# Altium PCB PCB.PcbDoc
Units mm, origin at the board's own origin, x right, y up, seen from the top; angles counter-clockwise.
Board outline 80.01 x 50.04 mm, 2 copper layers (Top Layer, Bottom Layer); 25 components, 40 nets, 101 pads, 2 vias.
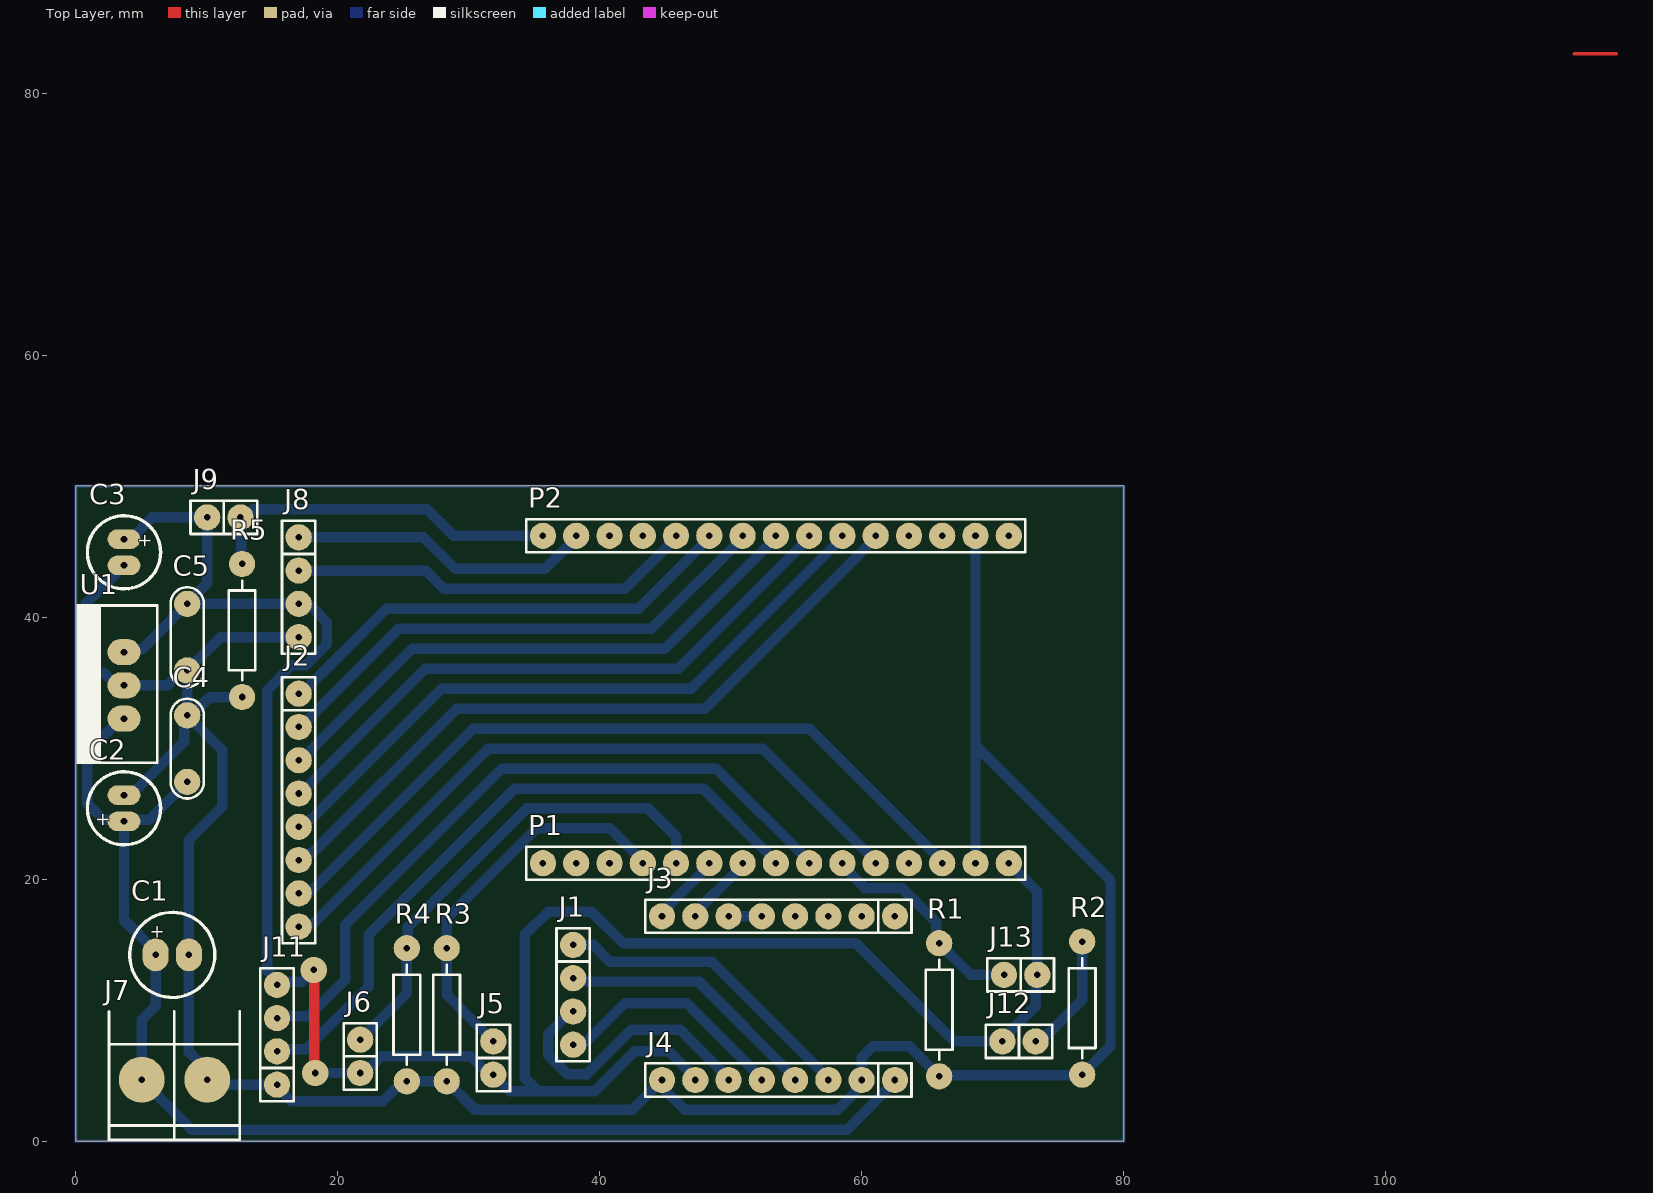
[diagram p0: Top Layer view]
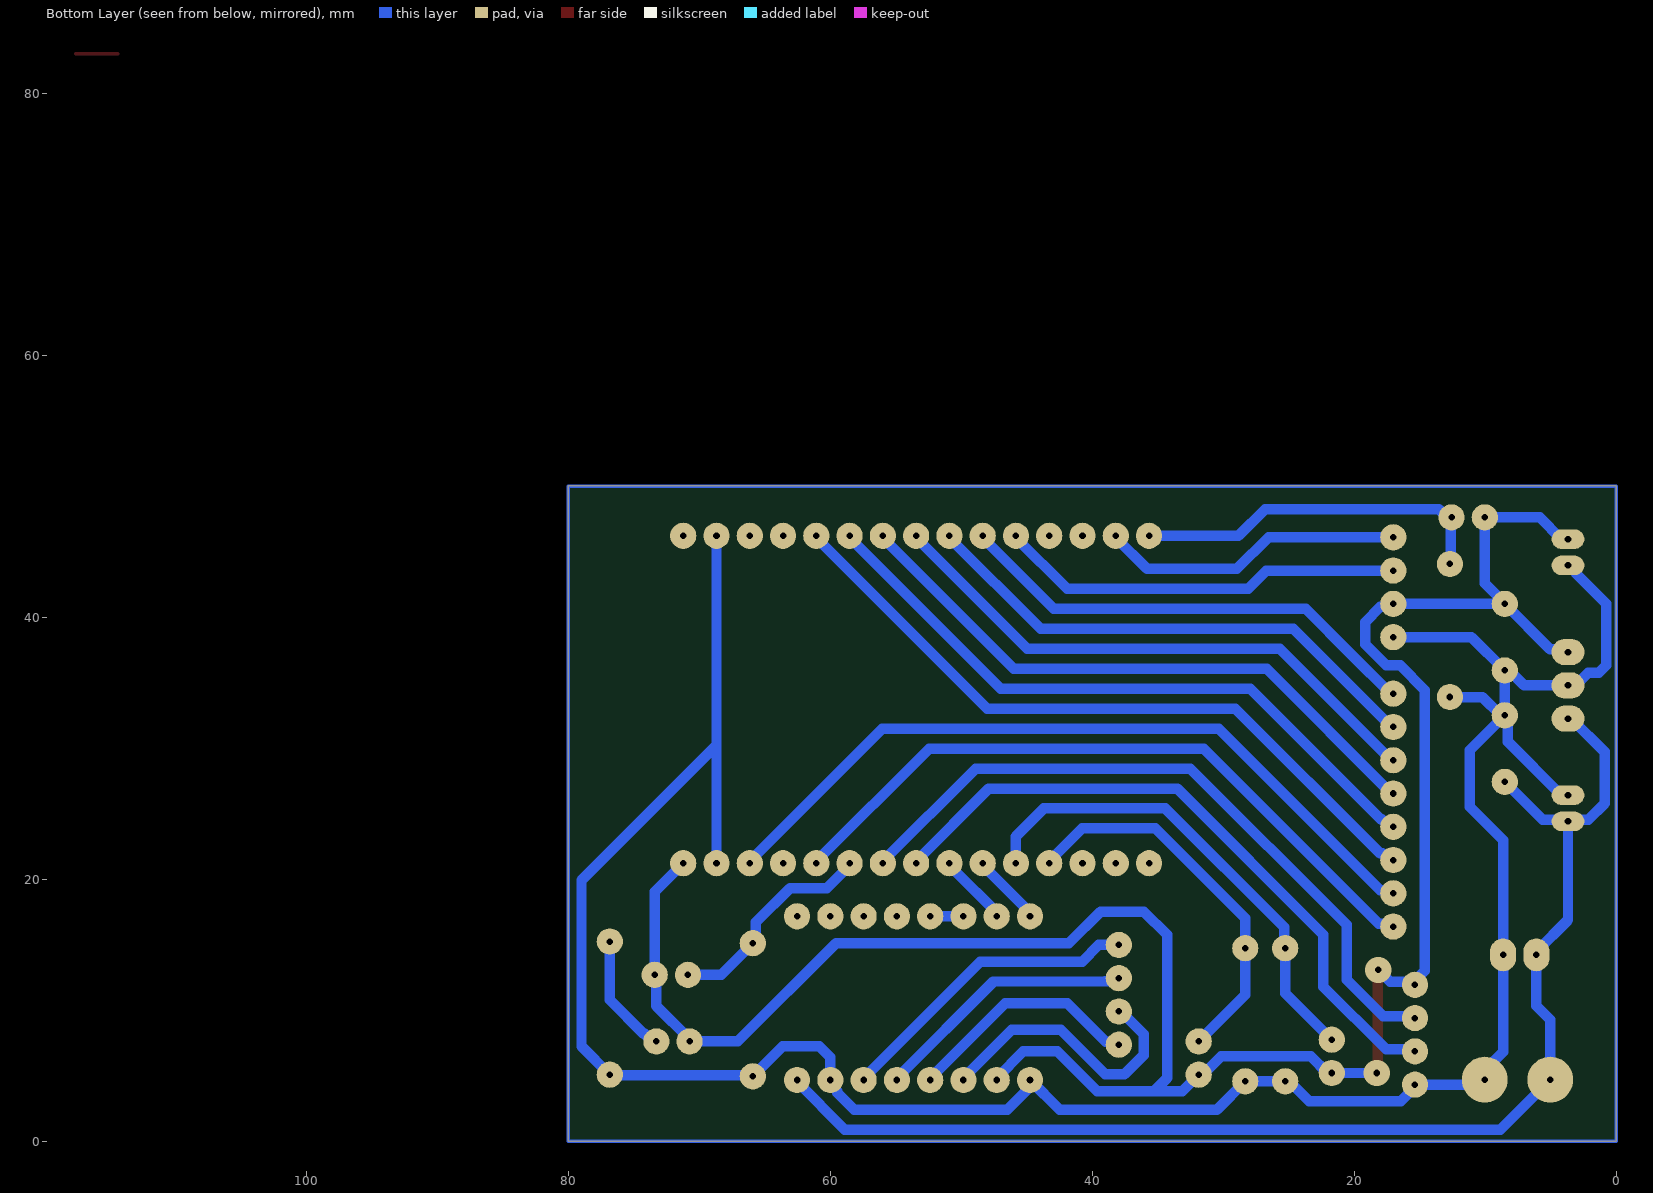
[diagram p1: Bottom Layer view, seen from below]

## Layer stack, top to bottom
Top Solder: solder mask 0.0102, Solder Resist, Dk 3.5
Top Layer: signal copper 0.0356
Dielectric 1: dielectric 0.32, FR-4, Dk 4.8
Bottom Layer: signal copper 0.0356
Bottom Solder: solder mask 0.0102, Solder Resist, Dk 3.5

## Board outline
0,0 0,50.038 80.01,50.038 80.01,0

## Design rules (kind name [scope] priority, off if disabled: settings)
Clearance Clearance_1 [All] p1: gap=0.5 ignorepadtopadclearanceinfootprint=FALSE
Clearance [All] p2: gap=0.5 ignorepadtopadclearanceinfootprint=FALSE
PolygonConnect [All] p1: connectstyle=Relief reliefconductorwidth=0.254 reliefentries=4 polygonreliefangle="90 Angle" airgapwidth=0.254
RoutingVias [All] p1: holewidth=0.711 width=1.27 viastyle="Through Hole" minholewidth=0.711 minwidth=1.27 maxholewidth=0.711 maxwidth=1.27
SolderMaskExpansion [All] p1: expansion=0.102 istentingtop=FALSE
Width [All] p1: maxlimit=0.8 minlimit=0.8 preferedwidth=0.8 checkconnectedcopper=TRUE
30 further rules are at their usual default settings.

## Components (designator, comment, footprint, x,y, rotation, side; value= is the part's Value field where it differs from the comment)
C1 "CAPPOL" CAP100RP2 7.366,14.224 r0 top
C2 "CAPPOL" CAP100RP 3.683,25.416 r90 top
C3 "CAPPOL" CAP100RP 3.683,44.958 r270 top
C4 "CAP" CAP200 8.509,29.972 r90 top
C5 "CAP" CAP200 8.509,38.481 r270 top
J1 "MOTOR" SIP4 37.973,11.176 r270 top
J2 "TECLADO" SIP8 17.018,34.163 r270 top
J3 "A4988-A" SIP8 62.535,17.172 r180 top
J4 "A4988-B" SIP8 62.535,4.672 r180 top
J5 "CON2" SIP2 31.877,6.35 r90 top
J6 "CON2" SIP2 21.717,6.477 r90 top
J7 "BORNERA 2" BORNERA2 7.533,4.7 r90 top
J8 "DISPLAY" SIP4 17.018,42.291 r270 top
J9 "CON2" SIP2 11.303,47.625 r0 top
J11 "ULTRASONICO" SIP4 15.367,8.128 r90 top
J12 "CON2" SIP2 72.009,7.62 r0 top
J13 "CON2" SIP2 72.136,12.7 r0 top
P1 "Header 15" HDR1X15 35.667,21.22 r0 top
P2 "Header 15" HDR1X15 35.667,46.22 r0 top
R1 "RES" RES400 65.913,4.953 r90 top
R2 "RES" RES400 76.835,5.08 r90 top
R3 "RES" RES400 28.321,4.572 r90 top
R4 "RES" RES400 25.273,4.572 r90 top
R5 "RES" RES400 12.7,33.909 r90 top
U1 "78XX" "TO-220 V" 3.683,34.798 r90 top

## Footprints (in the part's own frame and the unit in brackets; to place one, negate y for a bottom-side part, rotate by r counter-clockwise, add the part's x,y. Pads: shape width x height; smd on the part's side, far side on the other; paste and mask are expansions set on the pad)
BORNERA2 [mm] "Bornera con Tornillos 5mm separación"
  round 3.5 hole 0.5: 1(0,2.5) 2(0,-2.5)
  silkscreen extent -4.6,-5 5.2,5, body extent -3.76,-4.89 3.94,5.61, height 10
CAP100RP [mm] "Body diameter 5mm"
  oval 1.5x2.5 hole 0.5: 1(-1,0) 2(1,0)
  silkscreen extent -2.79,-2.79 2.79,2.79, body extent -2.53,-2.51 2.53,2.54, height 11.53
CAP100RP2 [mm] "Body diameter 6.5mm"
  oval 2x2.5 hole 0.5: 1(-1.27,0) 2(1.27,0)
  silkscreen extent -3.25,-3.25 3.25,3.25, body extent -3.15,-3.18 3.2,3.18, height 11.53
CAP200 [mm]
  round 2 hole 0.5: 1(-2.54,0) 2(2.54,0)
  silkscreen extent -3.81,-1.27 3.81,1.27, body extent -2.79,-1.17 2.79,1.12, height 6.24
HDR1X15 [mm] "Connector; Header; 15 Position"
  round 2 hole 0.5: 1(0,0) 2(2.54,0) 3(5.08,0) 4(7.62,0) 5(10.16,0) 6(12.7,0) 7(15.24,0) 8(17.78,0) 9(20.32,0) 10(22.86,0) 11(25.4,0) 12(27.94,0) 13(30.48,0) 14(33.02,0) 15(35.56,0)
  silkscreen extent -1.27,-1.27 36.83,1.27
RES400 [mm]
  round 2 hole 0.5: 1(0,0) 2(10.16,0)
  silkscreen extent 1.27,-1.02 8.89,1.02, body extent -0.3,-1.14 10.46,1.17, height 2.43
SIP2 [mm]
  round 2 hole 0.5: 1(-1.27,0) 2(1.27,0)
  silkscreen extent -2.54,-1.27 2.54,1.27
SIP4 [mm]
  round 2 hole 0.5: 1(-3.81,0) 2(-1.27,0) 3(1.27,0) 4(3.81,0)
  silkscreen extent -5.08,-1.27 5.08,1.27, body extent -5.08,-1.27 5.08,1.27, height 8.38
SIP8 [mm]
  round 2 hole 0.5: 1(0,0) 2(2.54,0) 3(5.08,0) 4(7.62,0) 5(10.16,0) 6(12.7,0) 7(15.24,0) 8(17.78,0)
  silkscreen extent -1.27,-1.27 19.05,1.27, body extent -1.27,-1.27 19.05,1.27, height 8.38
"TO-220 V" [mm]
  oval 2x2.5 hole 0.5: 1(-2.54,0) 2(0,0) 3(2.54,0)
  silkscreen extent -5.9,-2.54 6.1,3.54, body extent -5,-2 5,3, height 18

## Part data
J1 J8 J11: library part CON4
J2 J3 J4: library part CON8
P1 P2: "Header, 15-Pin", LatestRevisionDate=17-Jul-2002, LatestRevisionNote="Re-released for DXP Platform.", Publisher="Altium Limited"
U1: "REGULDOR POSITIVO"

## Via types
v1: diameter 2, hole 0.5, Top Layer to Bottom Layer, 2 vias

## Nets (pads, with @x,y where several pads share a name; then routed paths per layer and width w, separated by ;. In a path a pad name is that pad's centre, name@x,y a point inside that pad or via, vN(x,y) a via of type N, cw(c..) or ccw(c..) an arc to the next point about the centre after c; other vN are vias at no path point)
3V3: P2.15
+5V: C3.1 C5.1 J4.7 J5.1 J6.1 J8.3 J9.1 J11.4 J12.1 J13.2 P1.15 U1.3 | length 174.8
  Top Layer w0.8: v1(18.161,13.081) 18.224,13.018 18.224,5.271 v1(18.288,5.207)
  Bottom Layer w0.8: U1.3 3.913,37.568 5.056,37.568 C5.1 ; C3.1 4.183,45.958 5.85,47.625 J9.1 10.033,42.608 8.509,41.084 C5.1 ; J11.4 15.597,12.168 17.248,12.168 v1(18.161,13.081) ; J11.4@15.367,12.245 14.605,13.007 14.605,34.437 16.49,36.322 17.546,36.322 19.177,37.953 19.177,39.624 18.01,40.791 17.248,40.791 J8.3 C5.1 ; v1(18.288,5.207) J6.1 ; J6.1@22.042,5.207 23.307,6.472 30.16,6.472 J5.1@31.552,5.08 ; J5.1 33.147,3.81 35.306,3.81 ; J4.7 47.295,4.819 45.256,6.858 42.672,6.858 39.624,3.81 35.306,3.81 ; P1.15 73.406,19.041 J13.2 73.294,12.588 73.294,10.322 70.739,7.767 J12.1 67.056,7.62 59.563,15.113 41.783,15.113 39.37,17.526 36.068,17.526 34.29,15.748 34.29,4.826 35.306,3.81
A1: J1.4 J4.5 | length 17.9
  Bottom Layer w0.8: J1.4@38.203,7.596 38.965,7.596 41.91,10.541 46.653,10.541 52.375,4.819 J4.5
A2: J1.2 J4.4 | length 20.2
  Bottom Layer w0.8: J1.2 38.203,12.216 39.017,12.216 39.042,12.192 47.542,12.192 54.915,4.819 J4.4
B1: J1.3 J4.6 | length 21.7
  Bottom Layer w0.8: J1.3 37.826,9.906 36.073,8.153 36.073,6.579 37.542,5.11 39.019,5.11 42.418,8.509 46.145,8.509 49.835,4.819 J4.6
B2: J1.1 J4.3 | length 23.8
  Bottom Layer w0.8: J1.1 39.497,14.986 40.767,13.716 48.558,13.716 57.455,4.819 J4.3
D2: P2.12
D4: J2.6 P2.11 | length 54.4
  Bottom Layer w0.8: J2.6 17.343,21.463 17.844,21.965 18.028,21.965 29.083,33.02 48.014,33.02 61.067,46.073 P2.11
D5: J2.3 P2.8 | length 43.6
  Bottom Layer w0.8: J2.3 17.165,29.083 25.674,37.592 44.966,37.592 53.447,46.073 P2.8
D12: P1.12
D13: J2.7 P1.13 | length 58.7
  Bottom Layer w0.8: J2.7 17.248,19.153 18.01,19.153 30.353,31.496 56.018,31.496 66.147,21.367 P1.13
D14: J2.8 P1.11 | length 53.4
  Bottom Layer w0.8: J2.8 17.248,16.613 18.137,16.613 31.496,29.972 52.462,29.972 61.067,21.367 P1.11
D15: P2.13
D18: J2.2 P2.7 | length 40
  Bottom Layer w0.8: J2.2 17.165,31.623 24.658,39.116 43.95,39.116 50.907,46.073 P2.7
D19: J2.1 P2.6 | length 36.4
  Bottom Layer w0.8: J2.1 17.225,34.163 20.218,37.156 23.702,40.64 42.934,40.64 48.367,46.073 P2.6
D21: J8.2 P2.5 | length 31.2
  Bottom Layer w0.8: J8.2 26.709,43.561 28.106,42.164 41.918,42.164 45.827,46.073 P2.5
D22: J8.1 P2.2 | length 23.3
  Bottom Layer w0.8: J8.1 26.543,46.101 28.956,43.688 35.822,43.688 38.207,46.073 P2.2
D23: J9.2 P2.1 R5.2 | length 27.8
  Bottom Layer w0.8: R5.2 12.636,44.133 12.636,47.561 J9.2 12.898,47.625 13.533,48.26 26.797,48.26 28.837,46.22 P2.1
D25: J11.2 P1.8 | length 51.2
  Bottom Layer w0.8: J11.2 15.515,7.006 17.567,7.006 22.352,11.791 22.352,15.748 33.528,26.924 47.89,26.924 53.447,21.367 P1.8
D26: J11.3 P1.9 | length 54
  Bottom Layer w0.8: J11.3 15.515,9.546 17.801,9.546 20.574,12.319 20.574,16.51 32.512,28.448 48.906,28.448 55.987,21.367 P1.9
D27: J13.1 P1.10 R1.2 | length 16.9
  Bottom Layer w0.8: P1.10 58.527,21.073 60.28,19.32 63.074,19.32 65.683,16.711 65.683,15.343 R1.2 68.326,12.7 J13.1
  Bottom Layer w1: P1.10 P1.10@58.599,21.148
D32: J3.8 P1.6 | length 5.8
  Bottom Layer w0.8: J3.8@44.35,17.056 48.367,21.073 P1.6
D33: J3.7 P1.7 | length 5.8
  Bottom Layer w0.8: J3.7@46.89,17.056 50.907,21.073 P1.7
D34: J5.2 P1.4 R3.2 | length 29.9
  Bottom Layer w0.8: J5.2 28.321,11.176 R3.2 28.321,17.018 35.179,23.876 40.778,23.876 43.287,21.367 P1.4
D35: J6.2 P1.5 R4.2 | length 37.3
  Bottom Layer w0.8: J6.2 25.273,11.303 R4.2 25.336,14.795 25.336,16.319 34.417,25.4 43.688,25.4 45.827,23.261 P1.5
EN: P1.1
EN_DVR: J3.1
GND: C1.2 C2.2 C3.2 C4.2 C5.2 J4.2 J4.8 J7.2 J8.4 J11.1 P1.14 P2.14 R1.1 R2.1 R3.1 R4.1 R5.1 U1.2 | length 204.8
  Bottom Layer w0.8: C2.2 4.183,26.416 8.279,30.512 8.279,32.282 C4.2 ; C3.2 3.372,43.958 3.049,43.635 3.049,43.324 0.762,41.037 0.762,36.322 1.328,35.756 2.15,35.756 3.108,34.798 U1.2 7.041,34.798 8.184,35.941 C5.2 ; R5.1 10.223,33.909 8.826,32.512 C4.2 ; J11.1@15.367,4.294 10.439,4.294 J7.2 10.033,5.431 8.636,6.828 C1.2 8.636,22.987 11.176,25.527 11.176,29.845 C4.2 ; J11.1 15.367,4.117 16.436,3.048 23.424,3.048 24.948,4.572 R4.1 R3.1 30.48,2.413 42.496,2.413 J4.8 ; J8.4 11.049,38.481 C5.2 ; J4.8@44.972,3.923 46.482,2.413 58.166,2.413 59.454,3.701 59.454,3.807 59.995,4.347 J4.2 ; J4.2@59.995,4.525 59.995,6.401 60.833,7.239 63.627,7.239 R1.1 65.977,5.016 76.772,5.016 R2.1 78.994,7.239 78.994,19.919 68.687,30.226 ; P1.14 68.687,30.226 ; P2.14 68.687,30.226 ; C4.2 C5.2
MS1: J3.2
MS2: J3.3
MS3: J3.4
NetJ12_2: J12.2 R2.2 | length 9.3
  Bottom Layer w0.8: J12.2@73.444,7.404 73.444,7.46 74.169,8.185 74.225,8.185 76.835,10.795 R2.2
RESET: J3.5 J3.6 | length 2.5
  Bottom Layer w0.8: J3.6 J3.5
RX0: P2.4
RX2: J2.5 P2.10 | length 50.8
  Bottom Layer w0.8: J2.5 17.343,24.003 17.908,24.568 17.964,24.568 27.94,34.544 46.998,34.544 58.527,46.073 P2.10
TX0: P2.3
TX2: J2.4 P2.9 | length 47.2
  Bottom Layer w0.8: J2.4 17.165,26.543 26.69,36.068 45.982,36.068 55.987,46.073 P2.9
VMOT: C1.1 C2.1 C4.1 J4.1 J7.1 U1.1 | length 99.1
  Bottom Layer w0.8: U1.1 3.433,32.258 0.889,29.714 0.889,25.781 2.12,24.55 3.549,24.55 C2.1 ; C4.1 5.627,24.55 3.817,24.55 C2.1 ; J4.1 62.535,4.525 58.899,0.889 8.844,0.889 J7.1 5.033,9.267 6.096,10.33 C1.1 6.096,14.474 3.683,16.887 C2.1
VN: P1.3
VP: P1.2
copper on no net: | length 263.2
  Top Layer w0.254: 114.383,83.016 115.17,83.016 117.602,83.016
  Bottom Layer w0.254: 0,0 80,0 80,50 0,50 0,0

## Text inside footprints (layer, text, board x,y; h text height)
C1: Top Overlay "+" at 5.664,15.519 h1.02
C2: Top Overlay "+" at 2.515,23.968 h1.02 r90
C3: Top Overlay "+" at 4.851,46.406 h1.02 r270